# EAGLE board used-trico_embed01_atmpt03 (EAGLE 9.1.0)
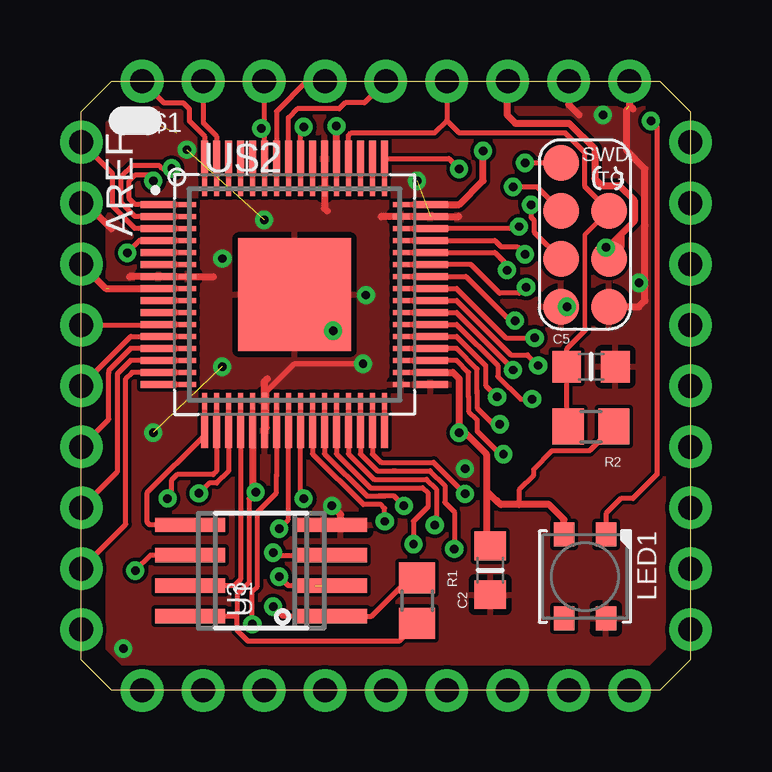
[diagram p0: board, top side]
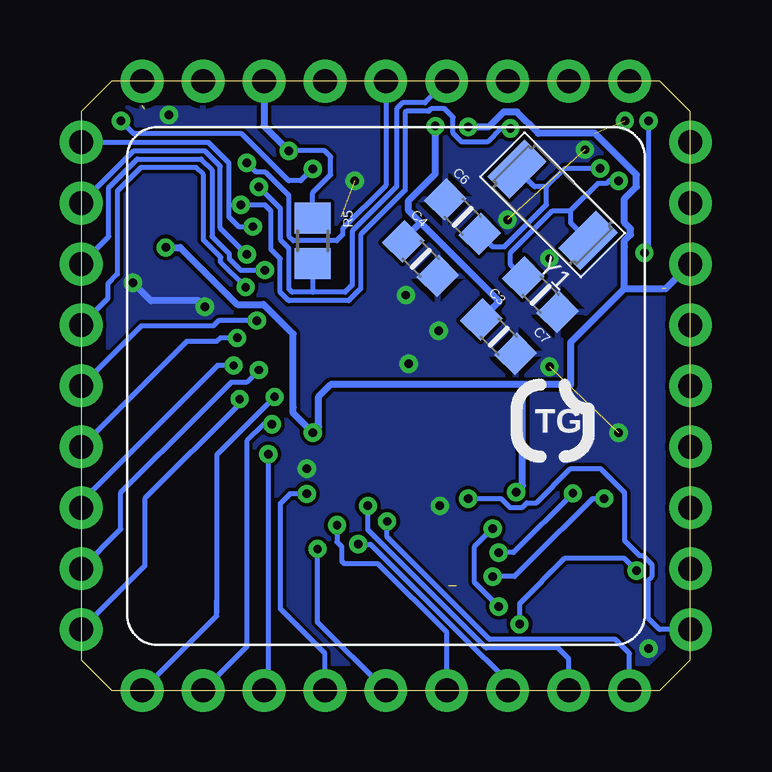
[diagram p1: board, bottom side, seen from below]

Size 25.4 x 25.4 mm. Coordinates in mm from the lower left corner, seen from the top.
Copper layers (1*16): Top 0.035mm / dielectric 1.5mm / Bottom 0.035mm
Design rules "default": minimum track width 6mil, minimum drill 0.35mm, track to track 6mil, track to pad 6mil, pad to pad 6mil, via to via 6mil, smd to smd 6mil, copper to edge 40mil, drill to drill 6mil, minimum pad ring 10mil, minimum via ring 8mil, stop-mask expansion 4mil, vias tented up to drill 0mil, thermal gap 10mil

## Footprints (pad centres in the part's own frame; a part is rotated, then mirrored left to right if it is on the bottom)
TG-C0805MP = smd 1.2 x 1.3: 1 -1.016,0; 2 1.016,0
LED3535 = smd 1 x 0.85: 1 -1.75,0.875; 2 -1.75,-0.875; 3 1.75,-0.875; 4 1.75,0.875
TG-R0805 = smd 1.3 x 1.5: 1 -0.95,0; 2 0.95,0
SOIC8_150MIL = smd 0.6 x 2.2: 1 -1.905,-2.6; 2 -0.635,-2.6; 3 0.635,-2.6; 4 1.905,-2.6; 5 1.905,2.6; 6 0.635,2.6; 7 -0.635,2.6; 8 -1.905,2.6
SOIC8_208MIL = smd 0.6 x 2.2: 1 -1.905,-3.315; 2 -0.635,-3.315; 3 0.635,-3.315; 4 1.905,-3.315; 5 1.905,3.315; 6 0.635,3.315; 7 -0.635,3.315; 8 -1.905,3.315
QFP50P1200X1200X120-64N = smd 1.47 x 0.28: 1 -5.67,3.75; 2 -5.67,3.25; 3 -5.67,2.75; 4 -5.67,2.25; 5 -5.67,1.75; 6 -5.67,1.25; 7 -5.67,0.75; 8 -5.67,0.25; 9 -5.67,-0.25; 10 -5.67,-0.75; 11 -5.67,-1.25; 12 -5.67,-1.75; 13 -5.67,-2.25; 14 -5.67,-2.75; 15 -5.67,-3.25; 16 -5.67,-3.75; 33 5.67,-3.75; 34 5.67,-3.25; 35 5.67,-2.75; 36 5.67,-2.25; 37 5.67,-1.75; 38 5.67,-1.25; 39 5.67,-0.75; 40 5.67,-0.25; 41 5.67,0.25; 42 5.67,0.75; 43 5.67,1.25; 44 5.67,1.75; 45 5.67,2.25; 46 5.67,2.75; 47 5.67,3.25; 48 5.67,3.75 | smd 0.28 x 1.47: 17 -3.75,-5.67; 18 -3.25,-5.67; 19 -2.75,-5.67; 20 -2.25,-5.67; 21 -1.75,-5.67; 22 -1.25,-5.67; 23 -0.75,-5.67; 24 -0.25,-5.67; 25 0.25,-5.67; 26 0.75,-5.67; 27 1.25,-5.67; 28 1.75,-5.67; 29 2.25,-5.67; 30 2.75,-5.67; 31 3.25,-5.67; 32 3.75,-5.67; 49 3.75,5.67; 50 3.25,5.67; 51 2.75,5.67; 52 2.25,5.67; 53 1.75,5.67; 54 1.25,5.67; 55 0.75,5.67; 56 0.25,5.67; 57 -0.25,5.67; 58 -0.75,5.67; 59 -1.25,5.67; 60 -1.75,5.67; 61 -2.25,5.67; 62 -2.75,5.67; 63 -3.25,5.67; 64 -3.75,5.67
MICROBUILDER_PQFN64-1 = smd 0.7 x 0.22: 1 -4.45,3.75; 2 -4.45,3.25; 3 -4.45,2.75; 4 -4.45,2.25; 5 -4.45,1.75; 6 -4.45,1.25; 7 -4.45,0.75; 8 -4.45,0.25; 9 -4.45,-0.25; 10 -4.45,-0.75; 11 -4.45,-1.25; 12 -4.45,-1.75; 13 -4.45,-2.25; 14 -4.45,-2.75; 15 -4.45,-3.25; 16 -4.45,-3.75; 33 4.45,-3.75; 34 4.45,-3.25; 35 4.45,-2.75; 36 4.45,-2.25; 37 4.45,-1.75; 38 4.45,-1.25; 39 4.45,-0.75; 40 4.45,-0.25; 41 4.45,0.25; 42 4.45,0.75; 43 4.45,1.25; 44 4.45,1.75; 45 4.45,2.25; 46 4.45,2.75; 47 4.45,3.25; 48 4.45,3.75 | smd 0.22 x 0.7: 17 -3.75,-4.45; 18 -3.25,-4.45; 19 -2.75,-4.45; 20 -2.25,-4.45; 21 -1.75,-4.45; 22 -1.25,-4.45; 23 -0.75,-4.45; 24 -0.25,-4.45; 25 0.25,-4.45; 26 0.75,-4.45; 27 1.25,-4.45; 28 1.75,-4.45; 29 2.25,-4.45; 30 2.75,-4.45; 31 3.25,-4.45; 32 3.75,-4.45; 49 3.75,4.45; 50 3.25,4.45; 51 2.75,4.45; 52 2.25,4.45; 53 1.75,4.45; 54 1.25,4.45; 55 0.75,4.45; 56 0.25,4.45; 57 -0.25,4.45; 58 -0.75,4.45; 59 -1.25,4.45; 60 -1.75,4.45; 61 -2.25,4.45; 62 -2.75,4.45; 63 -3.25,4.45; 64 -3.75,4.45 | smd 4.7 x 4.7: EXP 0,0
DL_IP_36-.1IN-PACKAGE = drill 1 pad 1.778: 1 -10.16,12.7; 2 -7.62,12.7; 3 -5.08,12.7; 4 -2.54,12.7; 5 0,12.7; 6 2.54,12.7; 7 5.08,12.7; 8 7.62,12.7; 9 10.16,12.7; 10 12.7,10.16; 11 12.7,7.62; 12 12.7,5.08; 13 12.7,2.54; 14 12.7,0; 15 12.7,-2.54; 16 12.7,-5.08; 17 12.7,-7.62; 18 12.7,-10.16; 19 10.16,-12.7; 20 7.62,-12.7; 21 5.08,-12.7; 22 2.54,-12.7; 23 0,-12.7; 24 -2.54,-12.7; 25 -5.08,-12.7; 26 -7.62,-12.7; 27 -10.16,-12.7; 28 -12.7,-10.16; 29 -12.7,-7.62; 30 -12.7,-5.08; 31 -12.7,-2.54; 32 -12.7,0; 33 -12.7,2.54; 34 -12.7,5.08; 35 -12.7,7.62; 36 -12.7,10.16
SWD_POGO = smd 1.5 x 1.5: 1 -1,-2; 2 -1,0; 3 -1,2; 4 -1,4; 5 1,-2; 6 1,0; 7 1,2
MICROBUILDER_CRYSTAL_4.9X1.8 = smd 1.3 x 2.2: 1 -2.1,0; 2 2.1,0

## Placement (x,y rotation side)
C2  1uf  [TG-C0805MP]  17.05,5.01 90 top
C3  100nf  [TG-C0805MP]  8,14.75 315 bottom
C4  4.7uf  [TG-C0805MP]  11.25,18 315 bottom
C5  .1uf  [TG-C0805MP]  21.25,13.5 0 top
C6  22pf  [TG-C0805MP]  9.5,19.75 315 bottom
C7  22pf  [TG-C0805MP]  6.25,16.5 135 bottom
LED1  LED-NEO-WS2812B3535  [LED3535]  21,4.75 270 top
R1  10k  [TG-R0805]  14,3.75 270 top
R2  10k  [TG-R0805]  21.25,11 180 top
R5  1k  [TG-R0805]  15.75,18.75 270 bottom
U1  [SOIC8_150MIL]  7.5,5 90 top
U3  [SOIC8_208MIL]  7.5,5 90 top
U$1  MCU-ATSAMD51J-ADATQFP  [QFP50P1200X1200X120-64N]  8.89,16.51 0 top
U$2  MCU-ATSAMD51J-ADAADA  [MICROBUILDER_PQFN64-1]  8.89,16.51 0 top
U$3  DL_IP_36-TRICO_PKG  [DL_IP_36-.1IN-PACKAGE]  12.7,12.7 0 top
U$4  SWD_POGO  [SWD_POGO]  21,18 0 top
U$5  LOGO-TG_TECHIEBIG?  [LOGO_TG_TEST_LARGE]  5.75,9.75 0 bottom
Y1  [MICROBUILDER_CRYSTAL_4.9X1.8]  5.75,20.25 135 bottom

## Library data of the parts
C2-C7 LED1 R1 R2 R5 U1 U3 U$1 Y1 = 0TG-Lib v01.3
U$2 U$5 = 0TG-Lib v01.4
U$3 U$4 = board packages dev

## Nets
3V3: C2.2 LED1.2 R1.2 R2.1 R5.1 U1.8 U3.8 U$1.8 U$1.21 U$1.34 U$1.48 U$1.56 U$2.8 U$2.21 U$2.34 U$2.48 U$2.56 U$3.7 U$3.34 U$4.6
A0: U$1.3 U$2.3 U$3.36
A1: U$1.14 U$2.14 U$3.30
A2: U$1.15 U$2.15 U$3.29
A3: U$1.13 U$2.13 U$3.31
A4: U$1.11 U$2.11 U$3.33
A5: U$1.12 U$2.12 U$3.32
AREF: U$1.4 U$2.4
D0: U$1.44 U$2.44 U$3.12
D1: U$1.43 U$2.43 U$3.13
D2: U$1.40 U$2.40 U$3.16
D3: U$1.39 U$2.39 U$3.17
D4: U$1.26 U$2.26 U$3.27
D5: U$1.27 U$2.27 U$3.26
D6: U$1.28 U$2.28 U$3.25
D7: U$1.25 U$2.25 U$3.28
D8: U$1.42 U$2.42 U$3.14
D9: U$1.41 U$2.41 U$3.15
D10: U$1.37 U$2.37 U$3.19
D11: U$1.38 U$2.38 U$3.18
D12: U$1.36 U$2.36 U$3.20
D13: U$1.35 U$2.35 U$3.21
D+: U$1.46 U$2.46 U$3.10
D-: U$1.45 U$2.45 U$3.11
FLASH_CS: R1.1 U1.1 U3.1 U$1.24 U$2.24
FLASH_IO0: U1.5 U3.5 U$1.17 U$2.17
FLASH_IO1: U1.2 U3.2 U$1.18 U$2.18
FLASH_IO2: U1.3 U3.3 U$1.19 U$2.19
FLASH_IO3: U1.7 U3.7 U$1.20 U$2.20
FLASH_SCK: U1.6 U3.6 U$1.23 U$2.23
GND: C2.1 C3.2 C4.2 C5.2 C6.1 C7.1 LED1.4 U1.4 U3.4 U$1.7 U$1.22 U$1.33 U$1.47 U$1.54 U$2.7 U$2.22 U$2.33 U$2.47 U$2.54 U$2.EXP U$3.8 U$3.9 U$3.35 U$4.1 U$4.5
MISO: U$1.31 U$2.31 U$3.22
MOSI: U$1.29 U$2.29 U$3.24
N$1: U$1.16 U$2.16
N$2: U$1.32 U$2.32
N$3: U$1.51 U$2.51
N$4: U$1.61 U$2.61
N$5: U$1.62 U$2.62
N$6: U$1.5 U$2.5
N$7: U$1.6 U$2.6
N$8: U$1.9 U$2.9
N$9: U$1.10 U$2.10
N$10: U$1.50 U$2.50
N$11: U$1.60 U$2.60
N$12: U$1.55 U$2.55
NEO_OUT: LED1.3
NEOPIX: LED1.1 U$1.49 U$2.49
RESET: C5.1 R2.2 U$1.52 U$2.52 U$3.6 U$4.7
SCK: U$1.30 U$2.30 U$3.23
SCL: U$1.64 U$2.64 U$3.1
SDA: U$1.63 U$2.63 U$3.2
SWDCLK: U$1.57 U$2.57 U$3.5 U$4.4
SWDIO: R5.2 U$1.58 U$2.58 U$3.4 U$4.3
SWO: U$1.59 U$2.59 U$3.3 U$4.2
VCORE: C3.1 C4.1 U$1.53 U$2.53
XTAL0: C6.2 U$1.2 U$2.2 Y1.2
XTAL1: C7.2 U$1.1 U$2.1 Y1.1

## Tracks (layer width: path | path; a pad name or v marks a point on that pad's centre or on a via)
3V3  (via drill 0.35)  (2 unrouted)
  Top 0.2: R2.1 21.2,10 19.64,10 18.86,9.23 18.86,8.97 18.25,8.36 18.25,7.75 | U$1.56 9.14,23.37 v9.27,23.5 | U1.8 4.75,3.1 | 4.75,3.1 U3.8 | 6.5,4 | 6.5,4 6.5,3.25 | 6.5,3.25 6.34,3.1 4.75,3.1 | 6.5,3.25 6.5,2.5 6.95,2.05 13.25,2.05 R1.2 | v7.27,8.27 6.99,7.99 6.99,4.49 6.5,4
  Top 0.225: U$2.56 U$1.56 | U$1.48 U$2.48 | U$1.34 U$2.34 | U$1.21 U$2.21 | U$2.8 U$1.8
  Top 0.3: U$3.34 1.02,16.76 U$1.8 | U$3.7 17.75,25.37 17.75,24 18.1,23.65 20.33,23.65 21.41,22.58 21.41,21.34 21.7,21.05 22.44,21.05 23.05,20.44 23.05,19.75 | 23.05,19.56 22.5,19.01 22.5,18.5 U$4.6 21.88,18.12 v21.88,18.47 21.96,18.47 23.05,19.56 | 23.05,19.75 23.05,19.56 | U$1.48 15.76,20.26 16.75,21.25 v16.75,22.5 | U$1.34 15.49,13.26 15.75,13 v15.75,10.75 16,10.75 16.91,9.84 16.91,8.75 | 23.05,19.56 23.05,19.75 | LED1.2 20.12,7.12 19.5,7.75 18.25,7.75 17.5,7.75 17.34,7.91 17.31,7.91 16.91,8.31 16.91,8.75 | U$1.21 7.14,8.4 v7.27,8.27 | C2.2 16.91,6.17 16.91,8.75 | U1.8 3.65,3.1 3.5,3.25 3.75,3
  Bottom 0.2: R5.1 15.75,20.75 15,21.5 15,22.25 15.25,22.5 v16.75,22.5
  Bottom 0.3: U$3.34 1.03,16.75 | 2.75,16.75 5,14.5 5,12.75 7,12.75 | U$3.7 17.78,23.53 v16.75,22.5 | v21.88,18.47 21.27,18.47 18.9,16.1 17.8,16.1 16.57,14.87 16.57,11.8 16.57,11.57 v15.75,10.75 15.5,11 15.5,12.25 15,12.75 7,12.75 | v9.27,23.5 8.41,23.5 7.79,24.12 7.23,24.12 6.34,23.23 3.98,23.23 | v7.27,8.27 7,8.54 7,12.75 | 2.75,16.75 1.17,16.75 | 2.75,16.75 | 2.75,16.75 2.75,18.5 2.75,18.75 2.5,19 2.5,19.25 2.75,19.5 2.75,20.5 2.25,21 2.25,21.5 3.98,23.23 | 3.98,23.23
  other vias: 2.73,23.75
A0
  Top 0.2: U$1.3 2.24,19.26 1.29,20.21 1.29,21.57 U$3.36
  Top 0.225: U$1.3 U$2.3
A1
  Top 0.2: U$3.30 1.5,9.12 1.5,13.21 2.06,13.76 U$1.14
  Top 0.225: U$2.14 3.25,13.76 U$1.14
A2
  Top 0.2: U$1.15 2.11,13.26 1.85,13 1.85,6.93 U$3.29
  Top 0.225: U$1.15 U$2.15
A3
  Top 0.2: U$3.31 1.15,11.31 1.15,13.25 1.15,13.35 2.06,14.26 U$1.13
  Top 0.225: U$1.13 3.5,14.26 U$2.13
A4
  Top 0.2: U$3.33 3.23,15.24 3.25,15.26
  Top 0.225: U$1.11 3.25,15.26 U$2.11
A5
  Top 0.2: U$1.12 2.06,14.76 U$3.32
  Top 0.225: U$2.12 3.5,14.76 U$1.12
AREF  (via drill 0.35)
  Top 0.2: v1.92,18.25 2.43,18.76 U$1.4
  Top 0.225: U$2.4 U$1.4
  Bottom 0.2: v1.75,23.75 1.75,18.42 v1.92,18.25
D0  (via drill 0.35)
  Top 0.2: U$1.44 17.24,18.26 17.75,17.75 v17.75,17.52
  Top 0.225: U$2.44 U$1.44
  Bottom 0.2: U$3.12 24.25,18.93 24.25,20.97 23.07,22.16 20.4,22.16 19.95,21.71 19.95,18.93 19.23,18.21 19.23,18 18.76,17.52 v17.75,17.52
D1  (via drill 0.35)
  Top 0.2: U$1.43 16.24,17.76 17.43,16.57 18.25,16.57 18.5,16.82 v18.55,16.82
  Top 0.225: U$2.43 U$1.43
  Bottom 0.2: U$3.13 24.28,16.36 24.28,16.97 23.9,17.35 23.9,20.83 22.92,21.8 20.61,21.8 20.31,21.5 20.31,18.79 19.59,18.06 19.59,17.85 v18.55,16.82
D2  (via drill 0.35)
  Top 0.2: U$1.40 | 14.25,16.26 15.65,16.26 17.83,14.08 | 17.83,14.08 17.91,13.99 | 17.83,14.08 17.91,13.99 | 17.91,13.99 18.61,13.99 v19.05,13.55
  Top 0.225: U$1.40 14.25,16.26 U$2.40
  Bottom 0.2: 25.38,7.62 U$3.16 25.4,7.87 19.72,13.55 v19.05,13.55
D3  (via drill 0.35)
  Top 0.2: U$1.39 15.65,15.76 | 15.65,15.76 | v18,13.36 18,13.41 15.65,15.76
  Top 0.225: U$2.39 U$1.39
  Bottom 0.2: U$3.17 23.75,6.73 23.75,8.25 20.4,11.6 | 20.4,11.6 20.18,11.82 | v18,13.36 18.51,12.85 19.15,12.85 20.4,11.6
D4  (via drill 0.35)
  Top 0.2: U$1.26 9.64,9.87 11.76,7.75 12.5,7.75 12.65,7.6 v12.65,7.05
  Top 0.225: U$2.26 U$1.26
  Bottom 0.2: U$3.27 2.54,1.54 3.13,2.13 8.38,2.13 12.65,6.4 v12.65,7.05
D5  (via drill 0.35)
  Top 0.2: 12.4,8.1 11.9,8.1 10.14,9.87 U$1.27 | 12.4,8.1 12.65,8.1 | v13.45,7.7 13.05,8.1 12.4,8.1
  Top 0.225: U$2.27 U$1.27
  Bottom 0.2: U$3.26 5.08,1.33 5.53,1.78 8.53,1.78 13.45,6.7 v13.45,7.7
D6  (via drill 0.35)
  Top 0.2: U$1.28 10.64,9.87 12.05,8.46 14.24,8.46 14.45,8.25 14.45,7.65 13.85,7.05 v13.85,6.1
  Top 0.225: U$1.28 U$2.28
  Bottom 0.2: 9.5,2.25 9.12,1.88 | U$3.25 7.62,0.37 9.5,2.25 | v13.85,6.1 13.35,6.1 9.5,2.25
D7  (via drill 0.35)
  Top 0.2: v9.27,8 9.14,8.13 U$1.25
  Top 0.225: U$1.25 U$2.25
  Bottom 0.2: v9.27,8 7.9,8 7.53,7.64 7.01,7.64 6.82,7.82 6.43,7.82 5,9.25 3.75,9.25 2.75,8.25 2.75,6.25 2.13,5.63 1.99,5.63 1.62,5.26 1.62,4.74 1.75,4.61 1.75,3 1.29,2.54 U$3.28
D8  (via drill 0.35)
  Top 0.2: U$1.42 16.04,17.26 17.88,15.42 v18.08,15.42
  Top 0.225: U$1.42 U$2.42
  Bottom 0.2: U$3.14 23.48,14.62 | 23.48,14.62 23.4,14.7 | v18.08,15.42 19.68,15.42 19.9,15.2 22.9,15.2 23.48,14.62
D9  (via drill 0.35)
  Top 0.2: U$1.41 | 14.25,16.76 15.64,16.76 17.7,14.7 v18.9,14.7
  Top 0.225: U$2.41 14.25,16.76 U$1.41
  Bottom 0.2: v18.9,14.7 19.6,14.7 19.75,14.55 21.01,14.55 U$3.15
D10  (via drill 0.35)
  Top 0.2: 14.5,14.76 15.65,14.76 16.86,13.55 16.86,12.72 v17.34,12.24
  Top 0.225: U$2.37 14.5,14.76 U$1.37
  Bottom 0.2: 19.75,3.75 19.75,3.25 | U$3.19 19.75,3.11 19.75,3.75 | v17.34,12.24 19.75,9.83 19.75,3.75
D11  (via drill 0.35)
  Top 0.2: U$1.38 15.65,15.26 | 15.65,15.26 | v18.8,12.15 18.32,12.15 17.37,13.1 17.37,13.54 15.65,15.26
  Top 0.225: U$1.38 U$2.38
  Bottom 0.2: U$3.18 22.75,5.19 22.75,8 18.8,11.95 v18.8,12.15
D12  (via drill 0.35)
  Top 0.2: U$1.36 15.65,14.26 16.5,13.41 16.5,12.5 | 16.5,12.38 16.5,12.5 | 16.5,12.5 16.5,11.78 17.19,11.1 v17.45,11.1
  Top 0.225: U$1.36 U$2.36
  Bottom 0.2: U$3.20 18.5,1.82 18.5,10.4 17.8,11.1 v17.45,11.1
D13  (via drill 0.35)
  Top 0.2: U$1.35 15.65,13.76 16.15,13.26 16.15,12.25 | 16.15,12.24 16.15,12.25 | 16.15,12.25 16.15,11.64 16.5,11.29 16.5,10.82 17.47,9.85 v17.6,9.85
  Top 0.225: U$2.35 U$1.35
  Bottom 0.2: 17.59,0.19 U$3.21 17.6,0.18 v17.6,9.85
D+  (via drill 0.35)
  Top 0.2: v18.25,19.34 18.17,19.26 U$1.46
  Top 0.225: U$2.46 U$1.46
  Bottom 0.2: U$3.10 20.11,22.86 19.25,22 19.25,19.75 18.84,19.34 v18.25,19.34
D-  (via drill 0.35)
  Top 0.2: U$1.45 17.24,18.76 17.5,18.5 18.18,18.5 v18.5,18.18
  Top 0.225: U$1.45 U$2.45
  Bottom 0.2: v18.5,18.18 19.6,19.29 19.6,21.85 20.26,22.51 23.21,22.51 U$3.11
FLASH_CS  (via drill 0.35)
  Top 0.2: U3.1 U1.1 8.4,3.1 v8,3.5 | 11.25,3.1 12.1,3.1 13.7,4.7 R1.1 | v8.25,6.75 8.64,7.14 8.64,11.5
  Top 0.225: U$2.24 8.64,11.5 U$1.24
  Top 0.3: U1.1 11.25,3.1
  Bottom 0.2: v8,3.5 9,4.5 9,6 v8.25,6.75
FLASH_IO0
  Top 0.2: U3.5 2.85,6.91 2.75,7 2.75,8.25 5.14,10.64 U$1.17
  Top 0.225: U$1.17 U$2.17
  Top 0.3: U3.5 U1.5
FLASH_IO1  (via drill 0.35)  (1 unrouted)
  Top 0.2: U$1.18 5.64,9.14 5.5,9 4,9 3.75,8.75 3.75,8.16 v3.6,8 | 9.75,4.37 8.63,4.37 v8.25,4.75
  Top 0.225: U$2.18 U$1.18
  Top 0.3: U3.2 9.75,4.37
  Bottom 0.2: v3.6,8 4.08,8 6.67,5.42 | 6.68,5.4 6.67,5.42 | 6.67,5.42 7.33,4.75 v8.25,4.75
FLASH_IO2  (via drill 0.35)
  Top 0.2: U$1.19 6.14,9.14 5.65,8.65 5.33,8.65 v4.91,8.22 | v8,5.75 8.12,5.63 U3.3
  Top 0.225: U$1.19 U$2.19
  Top 0.3: U1.3 U3.3
  Bottom 0.2: v4.91,8.22 7.37,5.75 v8,5.75
FLASH_IO3
  Top 0.2: U3.7 4.5,4.37 | 4.5,4.37 U1.7 | U$1.20 6.64,4.64 6.37,4.37 5.5,4.37 4.5,4.37
  Top 0.225: U$2.20 U$1.20
  Top 0.3: U1.7 5.5,4.37
FLASH_SCK  (via drill 0.35)
  Top 0.2: U3.6 3.75,5.63 2.88,5.63 v2.25,5 | v7.13,2.76 7.13,4.13 7.34,4.35 7.34,7.45 8.14,8.24 8.14,9 | U$1.23 8.14,9 | 8.14,9 8.14,8.93
  Top 0.225: U$1.23 U$2.23
  Top 0.3: U1.6 3.75,5.63
  Bottom 0.2: v2.25,5 2.75,5.5 5.25,5.5 7.13,3.62 v7.13,2.76
GND  (via drill 0.35)  (4 unrouted)
  Top 0.2: 15.74,19.76 15.75,19.75 | U$1.22 7.75,10.95 7.75,12.48 8.89,13.62 11.62,13.62 v11.75,13.62 | U3.4 U1.4
  Top 0.225: U$1.54 U$2.54 | U$2.22 U$1.22 | U$1.7 U$2.7 | U$2.47 U$1.47
  Top 0.3: 0.43,20.32 U$3.35 0.18,20.32 1.25,19.25 | 2,17.25 U$1.7 5.5,17.25 | U$3.8 20.32,24.43 20.75,24 | U$3.9 22.86,24.39 23,24.25 | 15.74,19.76 U$1.47 12.51,19.76 12.5,19.75 | U$1.54 10.14,20.11 10.25,20 | U$4.5 23.25,16 23.5,16.25 23.5,19.37 23.5,19.38 23.5,21.75 22.75,22.5 22.75,24.23 | U$1.22 7.64,12.89 7.75,13 | v20.25,16 U$4.1 | 9.6,6.91 U1.4 9.6,6.91 | 9.6,6.91 9.5,7 9.6,6.91 | U3.4 10.81,7.33 v10.45,7.7
  Bottom 0.3: U$3.35 0.43,20.32 | v20.25,16 20.5,16.25 22.5,16.25 v23.25,17
  other vias: 10.5,15 5.88,13.5 11.87,16.49 1.75,1.75 21.75,24 14,21.25 4.4,22.55 7.63,19.62 5.88,18.01 16,9.25 3,10.75
  pour Top: -1.27,26.67 26.67,26.67 26.67,-1.27 -1.27,-1.27
  pour Bottom: -2.54,27.94 27.94,27.94 27.94,-2.54 -2.54,-2.54
MISO  (via drill 0.35)
  Top 0.2: U$1.31 12.14,9.86 12.49,9.51 14.69,9.51 v16,8.2
  Top 0.225: U$2.31 U$1.31
  Bottom 0.2: v16,8.2 16.7,8.2 17.1,7.8 17.1,3.4 15.24,1.54 U$3.22
MOSI  (via drill 0.35)
  Top 0.2: U$1.29 11.14,9.86 12.2,8.81 14.4,8.81 14.8,8.4 14.8,6.95 | 14.8,6.95 v14.74,6.89 14.8,6.95
  Top 0.225: U$1.29 U$2.29
  Bottom 0.2: U$3.24 10.16,2.42 13.04,5.29 14.45,5.29 14.55,5.4 14.55,6 14.74,6.19 v14.74,6.89
N$1
  Top 0.225: U$2.16 U$1.16
N$2
  Top 0.225: U$1.32 U$2.32
N$3
  Top 0.225: U$2.51 U$1.51
N$4
  Top 0.225: U$2.61 U$1.61
N$5
  Top 0.225: U$1.62 U$2.62
N$6
  Top 0.225: U$1.5 U$2.5
N$7
  Top 0.225: U$2.6 U$1.6
N$8
  Top 0.225: U$1.9 U$2.9
N$9
  Top 0.225: U$2.10 U$1.10
N$10
  Top 0.225: U$1.50 U$2.50
N$11
  Top 0.225: U$1.60 U$2.60
N$12
  Top 0.225: U$1.55 U$2.55
NEOPIX  (via drill 0.35)
  Top 0.2: U$1.49 15.32,22.18 v15.75,21.75 | v23.75,23.75 24,23.5 24,14.75 | 24,14.75 24,14.5 | 24,14.75 24,9 23,8 22.5,8 21.88,7.38 LED1.1
  Top 0.225: U$2.49 U$1.49
  Bottom 0.2: v15.75,21.75 16.25,21.25 16.75,21.25 18.71,23.21 23.21,23.21 v23.75,23.75
RESET
  Top 0.195: U$4.7 21,19 21,15
  Top 0.2: U$4.7 21,21 21,22.41 20.17,23.25 15.75,23.25 15.24,23.76 | U$3.6 15.24,23.76 | U$1.52 11.14,23.14 11.25,23.25 14.73,23.25 15.24,23.76 | 21,15 20.23,14.23 C5.1 20.23,11.07 R2.2
  Top 0.225: U$1.52 U$2.52
SCK  (via drill 0.35)
  Top 0.2: 13,9.16 12.34,9.16 11.64,9.86 U$1.30 | 13,9.16 13.08,9.16 | 13,9.16 14.54,9.16 15.15,8.55 15.15,7.85 15.55,7.45 v15.55,5.9
  Top 0.225: U$1.30 U$2.30
  Bottom 0.2: U$3.23 15.55,2.85 v15.55,5.9
SCL
  Top 0.2: U$1.64 5.14,23.11 4.5,23.75 4.5,24.25 4.25,24.5 3.44,24.5 U$3.1
  Top 0.225: U$1.64 U$2.64
SDA
  Top 0.2: U$1.63 5.64,23.11 5.08,23.67 U$3.2
  Top 0.225: U$2.63 U$1.63
SWDCLK  (via drill 0.35)
  Top 0.2: U$1.57 8.64,23.89 9,24.25 10.75,24.25 11,24.5 11.8,24.5 U$3.5 | v18.5,22 U$4.4
  Top 0.225: U$1.57 U$2.57
  Bottom 0.2: 12.5,25.2 U$3.5 12.7,21.05 14.5,19.25 14.5,19 14.75,18.75 16.56,18.75 16.75,18.95 16.75,20.64 17.74,21.63 18.13,21.63 v18.5,22 18.5,21.89
SWDIO  (via drill 0.35)
  Top 0.2: U$3.4 9.4,25.4 8.14,24.14 U$1.58 | v18,21 19,21 U$4.3
  Top 0.225: U$2.58 U$1.58
  Bottom 0.2: 10.25,25.31 U$3.4 11.06,24.5 12,24.5 12.25,24.25 12.25,21 13.5,19.75 14.1,19.15 14.1,16.9 14.4,16.6 15.75,16.6 | R5.2 15.75,16.75 15.75,16.6 | 15.75,16.6 16.6,16.6 16.75,16.75 16.75,18.45 17.11,18.8 17.11,20.11 v18,21
SWO  (via drill 0.35)
  Top 0.2: 7.62,22.2 U$1.59 7.64,23.3 v7.51,23.44 7.62,23.55 U$3.3 | 18.75,20 v18.75,20.25 18.75,19.73 18.88,19.6 18.88,19.12 U$4.2
  Top 0.225: U$1.59 U$2.59
  Bottom 0.2: v7.51,23.44 7.9,23.44 8.47,22.87 9.53,22.87 9.9,23.24 9.9,23.9 10.25,24.25 10.81,24.25 10.91,24.15 11.85,24.15 11.9,24.1 11.9,20.85 13.75,19 13.75,16.75 14.25,16.25 16.75,16.25 17.1,16.6 17.1,18 17.5,18.4 17.5,20 17.75,20.25 v18.75,20.25
VCORE  (via drill 0.35)
  Top 0.225: U$2.53 U$1.53
  Top 0.3: U$1.53 v10.64,23.53
  Bottom 0.3: C3.1 8,16.19 8,16.25 11.25,19.5 | 11.25,19.5 11.97,18.78 C4.1 | 11.25,19.5 11.75,20 11.75,20.43 10.64,21.54 v10.64,23.53
XTAL0  (via drill 0.35)
  Top 0.2: U$1.2 2.24,19.76 1.65,20.35 1.65,21.4 2.13,21.88 3.26,21.88 3.37,21.77 | 3.37,21.77 v3.77,21.77 3.37,21.77
  Top 0.225: U$2.2 U$1.2
  Bottom 0.2: v3.77,21.77 5,21.77 5.23,21.77 6,21 | 6,21 6.5,21 Y1.2 | C6.2 | C6.2 8.25,18.5 7.75,18.5 6,20.25 6,21
XTAL1  (via drill 0.35)
  Top 0.2: U$1.1 2.24,20.26 2,20.5 2,21.25 2.25,21.5 3,21.5 v3,21.25
  Top 0.225: U$1.1 U$2.1
  Bottom 0.2: v3,21.25 3.39,21.25 3.51,21.14 3.86,21.14 5,20 | 5,20 5,19.5 Y1.1 | C7.2 7.5,17.75 7.5,18.25 5.75,20 5,20

## Text on the board
tPlace: AREF